# Altium PCB Motor_Driver_IR2184_Board_V1.1.PcbDoc
Units mil, origin at the board's own origin, x right, y up, seen from the top; angles counter-clockwise.
Board outline 3484.25 x 1968.5 mil, 2 copper layers (Top Layer, Bottom Layer); 71 components, 42 nets, 198 pads, 208 vias.
Unrouted connection lines stored in the file: 1.
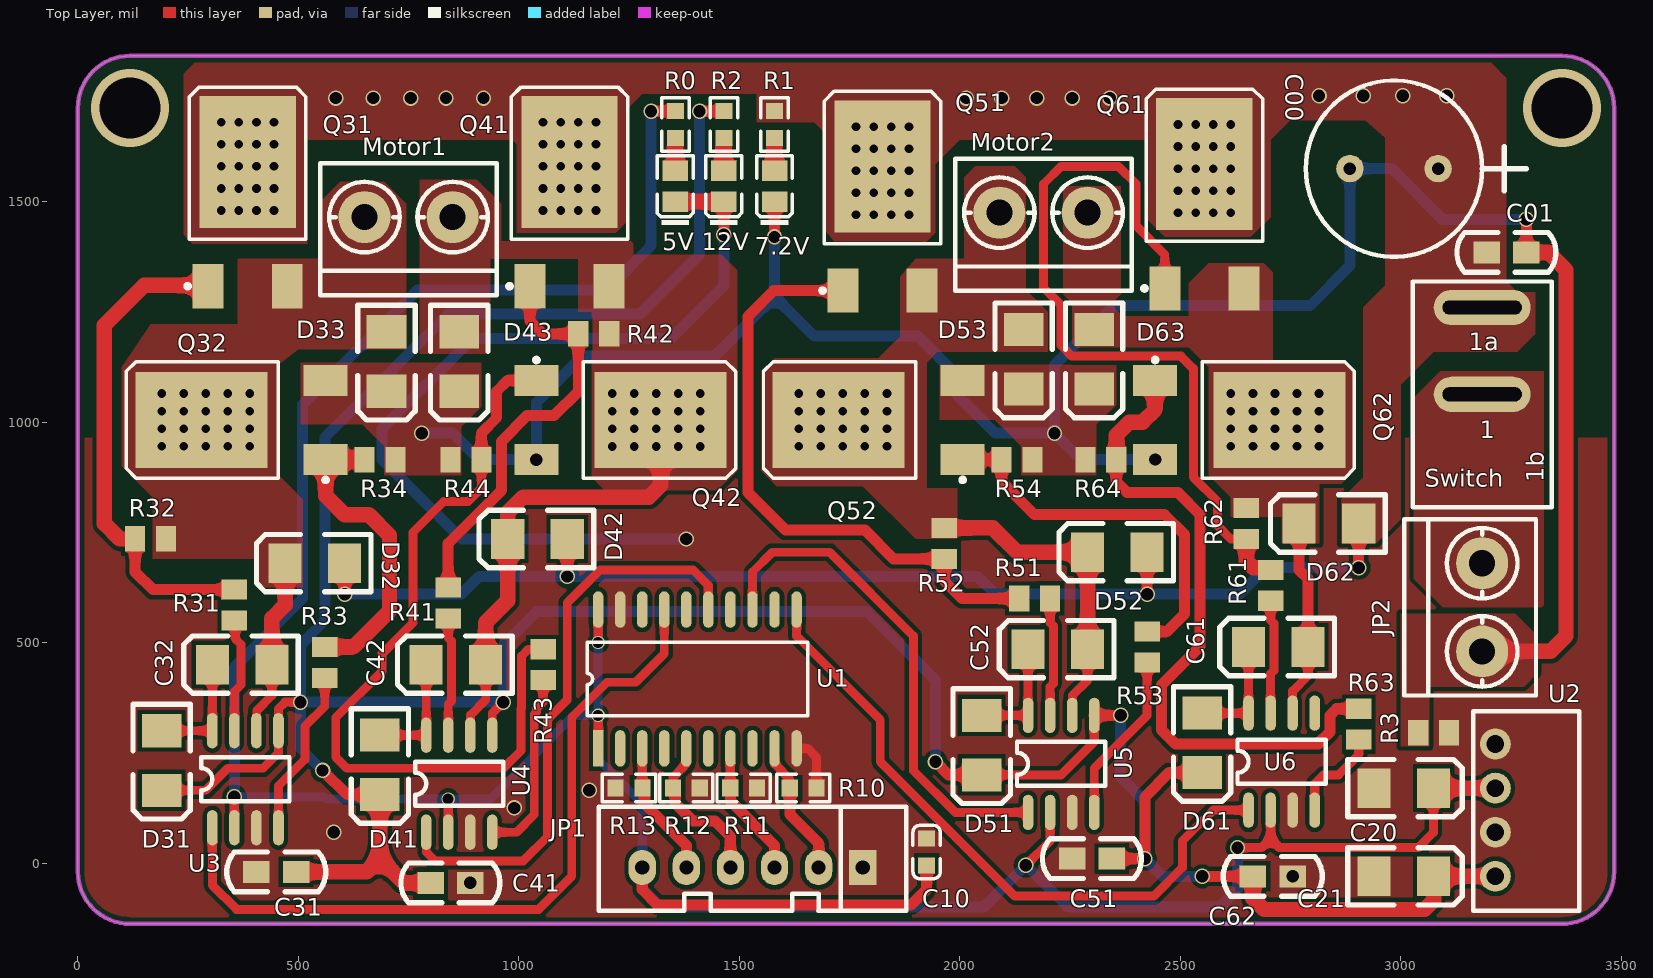
[diagram p0: Top Layer view]
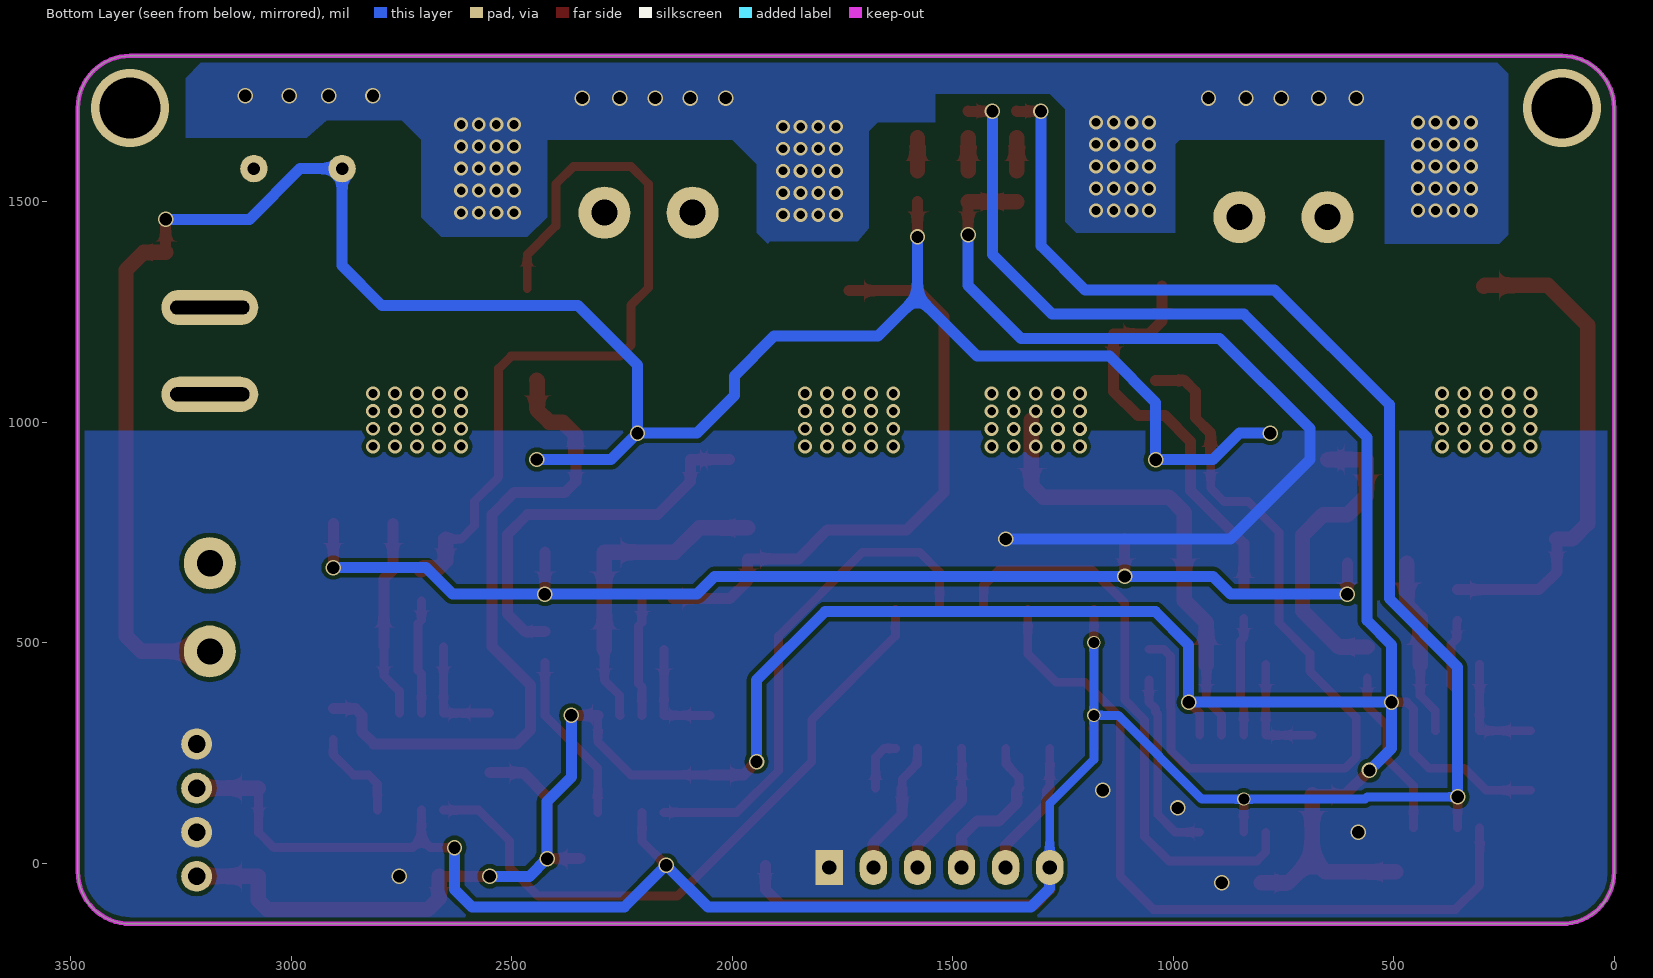
[diagram p1: Bottom Layer view, seen from below]
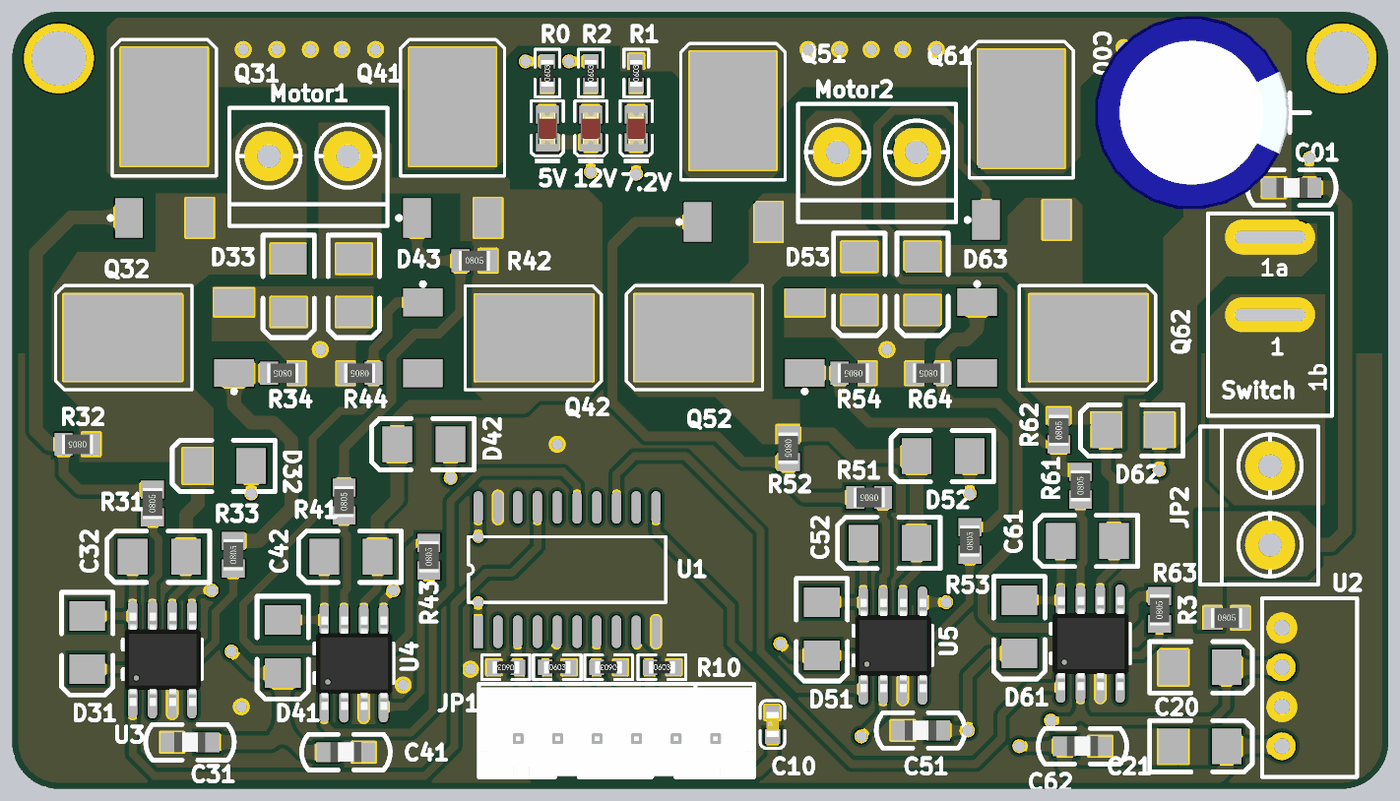
[diagram p2: 3D render of the assembled board from above, using the file's embedded part models]

## Layer stack, top to bottom
Top Solder: solder mask 0.4, Solder Resist, Dk 3.5
Top Layer: signal copper 1.4
Dielectric 1: dielectric 12.6, FR-4, Dk 4.8
Bottom Layer: signal copper 1.4
Bottom Solder: solder mask 0.4, Solder Resist, Dk 3.5

## Board outline
0,-19.68 0,1712.6 cw(c118.11,1712.6) 118.11,1830.71 3366.14,1830.71 cw(c3366.14,1712.6) 3484.25,1712.6 3484.25,-19.69 cw(c3366.14,-19.69) 3366.14,-137.8 118.11,-137.8 cw(c118.11,-19.68)

## Design rules (kind name [scope] priority, off if disabled: settings)
Clearance [All] p1: gap=10 ignorepadtopadclearanceinfootprint=FALSE except(0: Arc-Hole Track-Hole SMDPad-Hole THPad-Hole Via-Hole Fill-Hole Poly-Hole Region-Hole Text-Hole)
HoleSize [All] p1 off: absolutevalues=TRUE maxlimit=100 minlimit=1 maxpercent=80.000 minpercent=20.000
HoleToHoleClearance [All] p1 off: gap=10 allowstackedmicrovias=TRUE
MinimumSolderMaskSliver [All] p1 off: minsoldermaskwidth=10
PolygonConnect [All] p1: connectstyle=Direct reliefconductorwidth=10 reliefentries=4 polygonreliefangle="90 Angle" airgapwidth=10
RoutingVias [All] p1: holewidth=28 width=50 viastyle="Through Hole" minholewidth=28 minwidth=50 maxholewidth=28 maxwidth=50
SilkToSilkClearance [All] p1 off: silktosilkclearance=10
SilkToSolderMaskClearance [IsPad] p1 off: minsilkscreentomaskgap=10 clearancetoexposedcopper=TRUE
SolderMaskExpansion [All] p1: expansion=4
Width [All] p1: maxlimit=35 minlimit=10 preferedwidth=25
25 further rules are at their usual default settings.

## Components (designator, comment, footprint, x,y, rotation, side; value= is the part's Value field where it differs from the comment)
5V "" 0805_LED_S1 1355,1535 r90 top
7.2V "" 0805_LED_S1 1580,1535 r90 top
12V "" 0805_LED_S1 1465,1535 r90 top
C00 "470uF/25V" RB.2/.4 3085,1575 r0 top
C01 "100nF" 0805C 3285,1385 r180 top
C10 "100nF" 0603_C 1925,25 r90 top
C20 "" 3528 3075,170 r0 top value=4.7uF
C21 "" 3528 3075,-30 r0 top value=2.2uF
C31 "100nF" 0805C 495,-20 r180 top
C32 "10uF/35V" 3528 305,450 r180 top
C41 "100nF" 0805C 800,-45 r0 top
C42 "10uF/35V" 3528 790,450 r180 top
C51 "100nF" 0805C 2345,10 r180 top
C52 "10uF/35V" 3528 2155,485 r180 top
C61 "10uF/35V" 3528 2655,490 r180 top
C62 "100nF" 0805C 2665,-30 r0 top
D31 "1N5819" 3528 190,165 r270 top
D32 "1N5819" 3528 470,680 r180 top
D33 "1N5819" 3528 700,1070 r270 top
D41 "1N5819" 3528 685,155 r270 top
D42 "1N5819" 3528 975,735 r180 top
D43 "1N5819" 3528 865,1070 r270 top
D51 "1N5819" 3528 2050,200 r270 top
D52 "1N5819" 3528 2290,705 r180 top
D53 "1N5819" 3528 2145,1075 r270 top
D61 "1N5819" 3528 2550,205 r270 top
D62 "1N5819" 3528 2770,770 r180 top
D63 "1N5819" 3528 2305,1075 r270 top
JP1 "HEADER 6" SIP6N 1780,-10 r180 top
JP2 "HEADER 2" KF301-2P 3185,580 r180 top
Motor1 "HEADER 2" KF301-2P 750,1465 r270 top (schematic designator "Motor 1")
Motor2 "HEADER 2" KF301-2P 2190,1475 r270 top
Q31 "IR7843" LR7843 385,1450 r270 top
Q32 "IR7843" LR7843 420,1005 r0 top
Q41 "IR7843" LR7843 1115,1450 r270 top
Q42 "IR7843" LR7843 1181.73,1004.76 r180 top
Q51 "IR7843" LR7843 1825,1440 r270 top
Q52 "IR7843" LR7843 1865,1005 r0 top
Q61 "IR7843" LR7843 2555,1445 r270 top
Q62 "IR7843" LR7843 2585,1005 r180 top
R0 "4.7K" 0603_R 1355,1675 r90 top
R1 "4.7K" 0603_R 1580,1675 r90 top
R2 "4.7K" 0603_R 1465,1675 r90 top
R3 "0" 0805 3075,295 r0 top
R10 "10K" 0603_R 1645,170 r0 top
R11 "10K" 0603_R 1510,170 r180 top
R12 "10K" 0603_R 1380,170 r0 top
R13 "10K" 0603_R 1250,170 r180 top
R31 "20" 0805 355,585 r90 top
R32 "10k" 0805 165,735 r180 top
R33 "20" 0805 560,455 r90 top
R34 "10k" 0805 685,915 r180 top
R41 "20" 0805 840,590 r90 top
R42 "10k" 0805 1170,1200 r0 top
R43 "20" 0805 1055,450 r90 top
R44 "10k" 0805 880,915 r180 top
R51 "20" 0805 2170,600 r180 top
R52 "10k" 0805 1965,725 r270 top
R53 "20" 0805 2425,490 r90 top
R54 "10k" 0805 2130,915 r180 top
R61 "20" 0805 2705,630 r90 top
R62 "10k" 0805 2650,770 r90 top
R63 "20" 0805 2905,315 r90 top
R64 "10k" 0805 2320,915 r180 top
Switch "HEADER 2" SWITCH-MINI 3185,1063.15 r90 top
U1 "74HC245" SOP20 1180,260 r90 top
U2 "B0512S-1W" SIP4_B_S-1W 3165,-108 r0 top
U3 "IR2184" SO-8 305,80 r90 top
U4 "IR2184" SO-8 790,70 r90 top
U5 "IR2184" SO-8 2155,115 r90 top
U6 "IR2184" SO-8 2655,120 r90 top

## Footprints (in the part's own frame and the unit in brackets; to place one, negate y for a bottom-side part, rotate by r counter-clockwise, add the part's x,y. Pads: shape width x height; smd on the part's side, far side on the other; paste and mask are expansions set on the pad)
0603_C [mm]
  rect 0.93x0.98 smd: 1(-0.77,0) 2(0.77,0)
  silkscreen extent -1.53,-0.79 1.54,0.79, body extent -0.8,-0.4 0.8,0.4, height 0.3
0603_R [mm]
  rect 0.93x0.98 smd: 1(-0.77,0) 2(0.77,0)
  silkscreen extent -1.53,-0.79 1.54,0.79, body extent -0.85,-0.4 0.85,0.4, height 0.56
0805 [mm]
  rect 1.16x1.47 smd: 1(-0.89,0) 2(0.89,0)
  body extent -1,-0.63 1,0.63, height 0.55
0805_LED_S1 [mm]
  rect 1.16x1.47 smd: A(0.89,0) K(-0.89,0)
  silkscreen extent -2.24,-1.04 1.77,1.03, body extent -1.01,-0.62 1.01,0.62, height 1.1
0805C [mil]
  rect 60x50 smd: 1(0,0) 2(90,0)
  silkscreen extent -67,-45 157,45, body extent 6,-26 84,26, height 29
3528 [mil]
  rect 75x90 smd: 1(0,0) 2(-135,0)
  silkscreen extent -195,-65 65,65
KF301-2P [mm]
  round 3 hole 1.5: 1(0,2.54) 2(0,-2.54)
  silkscreen extent -3.1,-5.08 4.5,5.08
LR7843 [mm]
  rect 7.6x5.55 smd: 1(-3.556,0)
  rect 2.54x1.778 smd: 2(3.6,-2.28) 3(3.6,2.28)
  silkscreen extent -7.87,-3.58 3.72,3.35
RB.2/.4 [mil]
  round 62 hole 28: 1(0,0) 2(-200,0)
  silkscreen extent -300,-200 200,200, body extent -345,-246 147,246, height 986
SIP4_B_S-1W [mil]
  round 70 hole 40: 1(50,378) 2(50,278) 3(50,178) 4(50,78)
  silkscreen extent 0,0 240,453
SIP6N [mil]
  rect 62x80 hole 32: 1(0,0)
  oval 62x80 hole 32: 2(100,0) 3(200,0) 4(300,0) 5(400,0) 6(500,0)
  silkscreen extent -98,-138 598,98, body extent -99,-129 597,95, height 277
SO-8 [mil]
  oval 80x24 smd: 1(0,0) 2(0,-50) 3(0,-100) 4(0,-150) 5(220,-150) 6(220,-100) 7(220,-50) 8(220,0)
  silkscreen extent 60,-175 160,25, body extent -8,-172 228,20, height 67
SOP20 [mm]
  rect 2.1x0.6 smd: 1(0,0)
  oval 2.1x0.6 smd: 2(0,-1.27) 3(0,-2.54) 4(0,-3.81) 5(0,-5.08) 6(0,-6.35) 7(0,-7.62) 8(0,-8.89) 9(0,-10.16) 10(0,-11.43) 11(8,-11.43) 12(8,-10.16) 13(8,-8.89) 14(8,-7.62) 15(8,-6.35) 16(8,-5.08) 17(8,-3.81) 18(8,-2.54) 19(8,-1.27) 20(8,0)
  silkscreen extent 1.89,-12.06 6.11,0.64
SWITCH-MINI [mil]
  oval 80x220 hole 31.5 slot 180 at 90 deg: 1(0,0) 2(196.85,0)
  silkscreen extent -256,-157 256,157

## Part data
5V 7.2V 12V: library part LED
C00 C32 C42 C52 C61: library part CAPACITOR, "Capacitor"
C01 C10 C31 C41 C51 C62: library part CAP, "Capacitor"
C20 C21: library part "Cap Pol3", "Polarized Capacitor (Surface Mount)", LatestRevisionDate=29-May-2009, LatestRevisionNote="IPC-7351 Footprint Added.", PackageDescription="Chip Capacitor", PackageReference=C0805, Published=8-Jun-2000, Publisher="Altium Limited"
D31 D32 D33 D41 D42 D43 D51 D52 D53 D61 D62 D63: library part Diode, "Default Diode", Code_JEDEC=DO-214-AB, LatestRevisionDate=17-Jul-2002, LatestRevisionNote="Re-released for DXP Platform.", PackageDescription="DO-214-AB/SMC; 2 C-Bend Leads; Body 7.9 x 5.9 mm, inc. leads (LxW)", PackageReference=SMC, PackageVersion=Sep-1996, Published=8-Jun-2000, Publisher="Altium Limited"
Q31 Q32 Q41 Q42 Q51 Q52 Q61 Q62: library part MOSFET-N, "N-Channel MOSFET", LatestRevisionDate=17-Jul-2002, LatestRevisionNote="Re-released for DXP Platform.", PackageDescription="TO, Flat Index; 3 In-Line, Axial Leads; Body Dia. 4.6mm; Lead Dia. 0.5 mm (max)", PackageReference=E3, PackageVersion=1995/1996, Published=8-Jun-2000, Publisher="Altium Limited"
R0 R1 R2 R3 R10 R11 R12 R13: library part RES2
R31 R32 R33 R34 R41 R42 R43 R44 R51 R52 R53 R54 R61 R62 R63 R64: library part RES2_1
U2: library part "4 HEADER", "4 Pin Header"

## Via types
v1: diameter 31.5, hole 19.68, Top Layer to Bottom Layer, 160 vias
v2: diameter 35, hole 28, Top Layer to Bottom Layer, 43 vias
v3: diameter 30, hole 25, Top Layer to Bottom Layer, 3 vias
v4: diameter 177.17, hole 137.8, Top Layer to Bottom Layer, 2 vias

## Nets (pads, with @x,y where several pads share a name; then routed paths per layer and width w, separated by ;. In a path a pad name is that pad's centre, name@x,y a point inside that pad or via, vN(x,y) a via of type N, cw(c..) or ccw(c..) an arc to the next point about the centre after c; other vN are vias at no path point)
5V: C10.1 C20.1 JP1.6 R0.2 U1.1 U1.20 U2.2 U3.2 U4.2 U5.2 U6.2 | length 7313.5
  Top Layer w20: U3.2 v2(355,150) ; U4.2 v3(840,145) ; U1.1 v3(1180,335) ; v3(1180,500) U1.20 ; v2(2150,-5) 2205,50 U5.2 ; v2(2630,35) 2685,35 2705,55 ; U6.2 2705,55 ; C20.1 3074.23,169.23 3074.23,69.23 3040,35 2725,35 2705,55
  Top Layer w25: JP1.6 1280,-60 1315,-95 1890,-95 1925,-60 C10.1 ; v2(1300,1705) 1354.68,1705 R0.2
  Top Layer w35: C20.1 U2.2
  Bottom Layer w20: v2(355,150) 560,150 565,145 v3(840,145) 935,145 1125,335 v3(1180,335) ; v3(1180,500) v3(1180,335) ; JP1.6 1280,135 1180,235 v3(1180,335)
  Bottom Layer w25: v2(355,150) 355,445 510,600 510,1040 770,1300 1200,1300 1300,1400 v2(1300,1705) ; JP1.6 1280.44,-10.44 1280.44,-57.86 1322.58,-100 2055,-100 v2(2150,-5) 2245,-100 2590,-100 2630,-60 v2(2630,35)
7.2V: C00.1 C01.2 D32.2 D42.2 D52.2 D62.2 Q31.1 Q41.1 Q51.1 Q61.1 R1.2 Switch.2 | length 2708
  Top Layer w25: v2(605,610) D32.2 ; v2(1110,650) D42.2 ; v2(2425,610) D52.2 ; v2(2905,670) D62.2
  Bottom Layer w25: v2(605,610) 870,610 910,650 v2(1110,650) 2040,650 2080,610 v2(2425,610) 2635,610 2695,670 v2(2905,670)
  other v1: 1765,1470 1805,1470 1845,1470 1885,1470 2495,1475 2535,1475 2575,1475 2615,1475 325,1480 365,1480 405,1480 445,1480 1055,1480 1095,1480 1135,1480 1175,1480 1765,1520 1805,1520 1845,1520 1885,1520 2495,1525 2535,1525 2575,1525 2615,1525 325,1530 365,1530 405,1530 445,1530 1055,1530 1095,1530 1135,1530 1175,1530 1765,1570 1805,1570 1845,1570 1885,1570 2495,1575 2535,1575 2575,1575 2615,1575 325,1580 365,1580 405,1580 445,1580 1055,1580 1095,1580 1135,1580 1175,1580 1765,1620 1805,1620 1845,1620 1885,1620 2495,1625 2535,1625 2575,1625 2615,1625 325,1630 365,1630 405,1630 445,1630 1055,1630 1095,1630 1135,1630 1175,1630 1765,1670 1805,1670 1845,1670 1885,1670 2495,1675 2535,1675 2575,1675 2615,1675 325,1680 365,1680 405,1680 445,1680 1055,1680 1095,1680 1135,1680 1175,1680
  other v2: 585,1735 670,1735 755,1735 835,1735 920,1735 2015,1735 2095,1735 2175,1735 2255,1735 2340,1735 2815,1740 2915,1740 3005,1740 3105,1740
"7.2V In": JP2.2 Switch.1
12V: C21.1 C31.1 C41.1 C51.1 C62.1 D31.1 D41.1 D51.1 D61.1 R2.2 U2.4 U3.5 U4.5 U5.5 | length 7404.9
  Top Layer w20: D31.1 290,165 340,215 420,215 455,250 U3.5 455,350 470,365 v2(505,365) ; U4.5 940,340 v2(965,365) ; D51.1 2230,200 2305,275 U5.5
  Top Layer w25: v2(555,210) 610,155 D41.1 ; v2(1410,1705) 1464.68,1705 R2.2 ; v2(1945,230) 1975,200 D51.1 ; U5.5 v2(2365,335) ; C51.1 v2(2420,10) 2420,150 2475,205 D61.1 ; v2(2550,-30) C62.1
  Top Layer w35: C31.1 655,-20 685,10 ; D41.1 685,10 ; C41.1 740,-45 685,10 ; C62.1 2665,-80 2690.3,-105.3 3054.5,-105.3 3075,-84.79 C21.1 U2.4
  Bottom Layer w25: v2(555,210) 505,260 v2(505,365) ; v2(1410,1705) 1410,1380 1275,1245 840,1245 560,965 560,550 505,495 v2(505,365) ; v2(1945,230) 1945,415 1790,570 1040,570 965,495 v2(965,365) v2(505,365) ; v2(2365,335) 2365,195 2420,140 v2(2420,10) 2460,-30 v2(2550,-30)
GND: 5V.K 12V.K C10.2 C20.2 C21.2 C31.2 C41.2 C51.2 C62.2 JP1.1 R3.2 R10.2 R11.1 R12.2 R13.2 U1.10 U1.19 U2.1 U2.3 U3.3 U4.3 U5.3 U6.3 | length 2167.9
  Top Layer w20: U1.10 1655,260 1675,240 R10.2@1675,169.68
  Top Layer w25: v2(1465,1425) 12V.K
  Top Layer w35: 5V.K 12V.K
  Bottom Layer w25: v2(1380,735) 870,735 690,915 690,985.36 894.64,1190 1345,1190 1465,1310 v2(1465,1425)
  other v2: 890,-45 2755,-30 580,70 990,125 1160,165
"Motor In1": U1.17 U3.1 | length 1728.9
  Top Layer w20: U3.1 305,-50 360,-105 1045,-105 1120,-30 1120,330 1200,410 1265,410 1330,475 U1.17
"Motor In2": U1.15 U4.1 | length 1320.3
  Top Layer w20: U4.1 790,25 810,5 1010,5 1065,60 1065,325 1110,370 1110,590 1185,665 1395,665 1430,630 U1.15
"Motor In3": U1.13 U5.1 | length 1151.7
  Top Layer w20: U1.13 1530,660 1575,705 1705,705 1895,515 1895,210 1990,115 U5.1
"Motor In4": U1.11 U6.1 | length 1500.9
  Top Layer w20: U1.11 1630,515 1820,325 1820,230 2125,-75 2440,-75 2505,-10 2505,50 2575,120 U6.1
"Motor Out1": C32.2 D32.1 D33.2 Motor1.2 Q31.3 Q32.1 R32.1 U3.6 | length 406.9
  Top Layer w20: U3.6 405.77,300.77 405.77,345.77 440,380 C32.2
  Top Layer w35: C32.2 440,555 470,585 D32.1
  other v1: 190,945 240,945 290,945 340,945 390,945 190,985 240,985 290,985 340,985 390,985 190,1025 240,1025 290,1025 340,1025 390,1025 190,1065 240,1065 290,1065 340,1065 390,1065
"Motor Out2": C42.2 D42.1 D43.2 Motor1.1 Q41.3 Q42.1 R42.2 U4.6 | length 1060.5
  Top Layer w20: U4.6 890.77,290.77 890.77,335.77 925,370 C42.2
  Top Layer w35: C42.2 925,545 975,595 D42.1 975,795 1010,830 1295,830 1321.73,856.73 Q42.1
  other v1: 1211.73,944.76 1261.73,944.76 1311.73,944.76 1361.73,944.76 1411.73,944.76 1211.73,984.76 1261.73,984.76 1311.73,984.76 1361.73,984.76 1411.73,984.76 1211.73,1024.76 1261.73,1024.76 1311.73,1024.76 1361.73,1024.76 1411.73,1024.76 1211.73,1064.76 1261.73,1064.76 1311.73,1064.76 1361.73,1064.76 1411.73,1064.76
"Motor Out3": C52.2 D52.1 D53.2 Motor2.2 Q51.3 Q52.1 R52.1 U5.6 | length 732.3
  Top Layer w20: U5.6 2255.77,335.77 2255.77,380.77 2290,415 C52.2
  Top Layer w35: R52.1 R52.1 2075,760 2130,705 D52.1 C52.2
  other v1: 1635,945 1685,945 1735,945 1785,945 1835,945 1635,985 1685,985 1735,985 1785,985 1835,985 1635,1025 1685,1025 1735,1025 1785,1025 1835,1025 1635,1065 1685,1065 1735,1065 1785,1065 1835,1065
"Motor Out4": C61.2 D62.1 D63.2 Motor2.1 Q61.3 Q62.1 R62.2 U6.6 | length 452.8
  Top Layer w20: U6.6 2755,390 2790,425 C61.2
  Top Layer w25: D62.1 2770,665 2790,645 C61.2
  other v1: 2615,945 2665,945 2715,945 2765,945 2815,945 2615,985 2665,985 2715,985 2765,985 2815,985 2615,1025 2665,1025 2715,1025 2765,1025 2815,1025 2615,1065 2665,1065 2715,1065 2765,1065 2815,1065
Net5V_A: 5V.A R0.1 | length 74.6
  Top Layer w35: 5V.A R0.1
Net7.2V_A: 7.2V.A R1.1 | length 74.6
  Top Layer w35: 7.2V.A R1.1
Net12V_A: 12V.A R2.1 | length 74.6
  Top Layer w35: 12V.A R2.1
NetC32_1: C32.1 D31.2 U3.8 | length 265
  Top Layer w20: D31.2 U3.8 C32.1
NetC42_1: C42.1 D41.2 U4.8 | length 265
  Top Layer w20: D41.2 U4.8 C42.1
NetC52_1: C52.1 D51.2 U5.8 | length 255
  Top Layer w20: D51.2 U5.8 C52.1
NetC61_1: C61.1 D61.2 U6.8 | length 255
  Top Layer w20: D61.2 U6.8 C61.1
NetC62_1: U6.5
NetQ31_2: Q31.2 R31.2 R32.2 | length 1124.3
  Top Layer w25: R32.2 R32.2 130,660 169.96,620.04 R31.2
  Top Layer w35: R32.2 95,735 60,770 60,1220 150,1310 293.5,1310 Q31.2
NetQ32_2: Q32.2 R33.2 R34.2 | length 704.7
  Top Layer w35: R33.2 625.04,490.04 706.73,571.73 706.73,743.27 660,790 605,790 561.73,833.27 Q32.2 561.85,915.12 649.84,915.12 R34.2
NetQ41_2: Q41.2 R41.2 R42.1 | length 933.5
  Top Layer w25: R41.2 840,725 960.37,845.37 960.37,956.56 1018.82,1015 1080,1015 1134.96,1069.96 R42.1 1055,1200 1025.24,1229.76 Q41.2
NetQ42_2: Q42.2 R43.2 R44.1 | length 1830.7
  Top Layer w20: R44.1 915.04,850.04 885,820 830,820 760,750 760,545 690,475 690,435 585,330 585,240 610,215 965,215 1005,255 1005,349.85 1006.06,350.92 1006.06,469.35 1021.72,485 R43.2 R43.2
  Top Layer w25: R44.1 915.04,975.04 950,1010 950,1070 974.53,1094.53 Q42.2
NetQ51_2: Q51.2 R51.2 R52.2 | length 1383
  Top Layer w25: Q51.2 1578.27,1298.27 1520,1240 1520,840 1605,755 1785,755 1850.04,689.96 R52.2 1965,640 2005,600 R51.2
NetQ52_2: Q52.2 R53.2 R54.2 | length 884.6
  Top Layer w25: Q52.2 2006.85,915.12 2094.84,915.12 R54.2 2094.96,865.04 2170,790 2465,790 2510,745 2510,565 2470,525 R53.2 R53.2
NetQ61_2: Q61.2 R61.2 R62.1 | length 1780.8
  Top Layer w20: Q61.2 2465.24,1380 2465,1380 2400,1445 2400,1540 2360,1580 2230,1580 2190,1540 2190,1305 2230,1265 2230,1174.22 2254.45,1149.76 2501.55,1149.76 2530,1121.32 2530,875 2585,820 2585,764.96 2615,734.96 R62.1
  Top Layer w35: R62.1 2650,685.54 2665.5,670.04 2700,670.04 R61.2
NetQ62_2: Q62.2 R63.2 R64.1 | length 1545.9
  Top Layer w25: R64.1 R64.1 2355,865 2380,840 2495,840 2545,790 2545,491.37 2457.5,403.87 2457.5,302.14 2489.64,270 2814.04,270 2814.04,272.25 2839.5,297.71 2839.5,334.5 2855,350 R63.2 R63.2
  Top Layer w35: R64.1 2355.53,915.49 2355.53,970.53 2385,1000 2415,1000 2442.77,1027.77 2442.77,1094.26 Q62.2
NetR31_1: R31.1 U3.7 | length 262.4
  Top Layer w20: U3.7 355,389.22 370,404.22 370,495.78 356.94,508.84 356.94,548.02 R31.1
NetR33_1: R33.1 U3.4 | length 383.5
  Top Layer w20: U3.4 455,175 515,235 515,310 560,355 R33.1
NetR41_1: R41.1 U4.7 | length 271.2
  Top Layer w20: U4.7 840,360 847.5,367.5 847.5,503.28 840,510.78 R41.1
NetR43_1: R43.1 U4.4 | length 424.8
  Top Layer w20: U4.4 995,70 1035,110 1035,337.43 1040,342.43 1040,350 1055,365 R43.1
NetR51_1: R51.1 U5.7 | length 271.2
  Top Layer w20: U5.7 2205,400 2212.5,407.5 2212.5,538.28 2205.04,545.74 R51.1
NetR53_1: R53.1 U5.4 | length 389.7
  Top Layer w20: U5.4 2305,215 2425,335 R53.1
NetR61_1: R61.1 U6.7 | length 261.2
  Top Layer w20: U6.7 2705,429.22 2712.5,436.72 2712.5,543.28 2705,550.78 R61.1
NetR63_1: R63.1 U6.4 | length 221.4
  Top Layer w20: U6.4 2805,180 2825,200 2859.22,200 2905,245.78 R63.1
PGND: 7.2V.K C00.2 C01.1 D33.1 D43.1 D53.1 D63.1 JP2.1 Q32.3 Q42.3 Q52.3 Q62.3 R3.1 R34.1 R44.2 R54.1 R64.2 | length 5113.9
  Top Layer w25: v2(1580,1420) 7.2V.K ; C01.1 v2(3285,1460)
  Top Layer w35: JP2.1 3340,480 3375,515 3375,1345 3335,1385 C01.1
  Bottom Layer w25: v2(780,975) 850,975 910,915 v2(1040,915) 1040,1045 1145,1150 1445,1150 1580,1285 ; v2(1580,1420) 1580,1285 ; v2(2443.27,915.24) 2274.76,915.24 v2(2215,975) ; v2(3285,1460) 3095,1460 2980,1575 C00.2 2885,1355 2795,1265 2350,1265 2215,1130 v2(2215,975) ; 1580,1285 1670,1195 1905,1195 1995,1105 1995,1060 2080,975 v2(2215,975)
PWM1: JP1.5 R13.1 U1.3 | length 311.4
  Top Layer w20: U1.3 1280,170.31 R13.1
  Top Layer w25: R13.1 1285.47,164.84 1285.47,134.53 1380,40 JP1.5
PWM2: JP1.4 R12.1 U1.5 | length 365.8
  Top Layer w20: R12.1 1350,170.31 1350,195 1380,225 U1.5
  Top Layer w25: R12.1 1355.16,164.53 1355.16,134.84 1395,95 1445,95 1480,60 JP1.4
PWM3: JP1.3 R11.2 U1.7 | length 311.8
  Top Layer w20: R11.2 1479.53,170.16 1479.53,259.53 U1.7
  Top Layer w25: R11.2 1479.68,140.32 1580,40 JP1.3
PWM4: JP1.2 R10.1 U1.9 | length 311.4
  Top Layer w20: U1.9 1580,225 1614.69,190.31 R10.1
  Top Layer w25: R10.1 1614.69,110.31 1680,45 JP1.2
pads on no net: U1.2 U1.4 U1.6 U1.8 U1.12 U1.14 U1.16 U1.18
copper on no net:
  other v4: 118.11,1712.6 3366.14,1712.6

## Polygon pours and split planes (outlines as drawn)
GND on Top Layer "Top Layer-No Net" (solid, remove dead copper, pour order 68): -220,910 -165,965 4030,965 4030,-355 4020,-365 3990,-335 -205,-335
7.2V on Top Layer "Top Layer-No Net" (solid, remove dead copper, pour order 66): 2865,725 2945,725 3000,780 3000,1085 3075,1160 3265,1160 3305,1200 3305,1295 3265,1295 3240,1320 3230,1310 2965,1310 2915,1260 2915,875 2865,825
"Motor Out3" on Top Layer "Top Layer-No Net" (solid, remove dead copper, pour order 60): 1815,1040 1925,1040 1925,1135 1950,1160 1950,1195 1865,1195 1815,1145
"Motor Out4" on Top Layer "Top Layer-No Net" (solid, remove dead copper, pour order 58): 2325,1210 2400,1210 2325,1285
"Motor Out4" on Top Layer "Top Layer-No Net" (solid, remove dead copper, pour order 56): 2565,1040 2645,1040 2645,1175 2515,1175 2565,1125
no net on Top Layer "Top Layer-No Net" (solid, remove dead copper, pour order 50): 2535,1170
"Motor Out2" on Top Layer "Top Layer-No Net" (solid, remove dead copper, pour order 44): 775,1550 775,1370 1135,1370 1135,1250 1260,1250 1260,1405 1255,1410 960,1410 960,1495 905,1550
7.2V on Top Layer "Top Layer-No Net" (solid, remove dead copper, pour order 18): 520,1405 260,1405 240,1425 240,1790 265,1815 290,1815 3205,1815 3240,1780 3240,1770 3240,1295 3305,1295 3305,1200 2970,1200 2965,1205 2965,1645 2920,1685 2915,1685 2750,1685 2705,1640 2705,1465 2660,1420 2465,1420 2420,1465 2420,1640 2000,1640 1945,1585 1945,1430 1920,1405 1915,1410 1715,1410 1690,1440 1690,1445 1690,1660 1670,1680 1540,1680 1540,1745 1280,1745 1245,1710 1245,1455 1220,1430 995,1430 995,1630 985,1640 520,1640
"Motor Out4" on Top Layer "Top Layer-No Net" (solid, remove dead copper, pour order 42): 2265,1240 2520,1240 2520,1315 2565,1360 2690,1360 2710,1340 2710,1170 2263.05,1170 2262.9,1170.16
no net on Top Layer "Top Layer-No Net" (solid, remove dead copper, pour order 40): 2265,1255
PGND on Top Layer "Top Layer-No Net" (solid, remove dead copper, pour order 22): 3065,265 3065,400 3280,400 3310,430 3310,515 3260,565 3000,565 3000,265
PGND on Top Layer "Top Layer-No Net" (solid, remove dead copper, pour order 28): 1955,1130 2355,1130 2355,1040 2310,995 2310,880 2140,880 2140,945 2085,1000 2080,1005 1955,1005
no net on Top Layer "Top Layer-No Net" (solid, remove dead copper, pour order 26): 1950,1135
PGND on Top Layer "Top Layer-No Net" (solid, remove dead copper, pour order 24): 505,1135 915,1135 915,1035 870,990 870,880 695,880 695,945 645,995 505,995
"7.2V In" on Top Layer "Top Layer-No Net" (solid, remove dead copper, pour order 20): 3090,1115 3030,1055 3030,1035 3030,645 3095,580 3320,580 3325,585 3325,1115
"Motor Out4" on Top Layer "Top Layer-No Net" (solid, remove dead copper, pour order 16): 2690,1360 2710,1340 2710,1140 2715,1135 2870,1135 2895,1110 2895,890 2865,860 2815,860 2815,725 2730,725 2730,785 2615,785 2615,830 2565,880 2565,1360
"Motor Out4" on Top Layer "Top Layer-No Net" (solid, remove dead copper, pour order 14): 2230,1535 2235,1530 2235,1290 2255,1270 2255,1170 2350,1170 2350,1275 2370,1295 2365,1300 2365,1535
"Motor Out3" on Top Layer "Top Layer-No Net" (solid, remove dead copper, pour order 12): 1995,735 1900,735 1780,855 1585,855 1550,890 1550,1115 1580,1145 1865,1145 1865,1330 1900,1370 1890,1370 2010,1370 2010,1555 2035,1580 2125,1580 2150,1555 2150,1300 2155,1295 2200,1250 2200,1160 1925,1160 1925,1145 1925,850 1995,850
"Motor Out2" on Top Layer "Top Layer-No Net" (solid, remove dead copper, pour order 10): 825,1550 890,1550 935,1505 935,1160 930,1155 775,1155 775,1510
"Motor Out1" on Top Layer "Top Layer-No Net" (solid, remove dead copper, pour order 8): 745,1495 695,1545 595,1545 550,1500 550,1370 362.5,1370 362.5,1222.5 165,1222.5 100,1125 100,900 170,830 170,690 405,690 405,640 420,625 510,625 510,825 450,885 455,890 455,1130 500,1165 745,1165
no net on Top Layer "Top Layer-No Net" (solid, remove dead copper, pour order 6): 760,1180
"Motor Out2" on Top Layer "Top Layer-No Net" (solid, remove dead copper, pour order 4): 1165,1345 1165,875 1195,845 1455,845 1455,850 1495,890 1495,1345 1460,1380 1195,1380
no net on Top Layer "Top Layer-No Net" (solid, remove dead copper, pour order 2): 1155,1345
no net on Top Layer "Top Layer-No Net" (solid, remove dead copper, pour order 0): 1165,1365
GND on Bottom Layer "Top Layer-No Net" (solid, remove dead copper, pour order 70): -275,980 4070,980 4080,970 4080,-500 -920,-500 -930,-490
7.2V on Bottom Layer "Top Layer-No Net" (solid, remove dead copper, pour order 48): 520,1405 260,1405 240,1425 240,1790 265,1815 290,1815 3205,1815 3240,1780 3240,1770 3240,1645 2965,1645 2920,1685 2915,1685 2750,1685 2705,1640 2705,1465 2660,1420 2465,1420 2420,1465 2420,1640 2000,1640 1945,1585 1945,1430 1920,1405 1915,1410 1715,1410 1690,1440 1690,1445 1690,1660 1670,1680 1540,1680 1540,1745 1280,1745 1245,1710 1245,1455 1220,1430 995,1430 995,1630 985,1640 520,1640
no net on Bottom Layer "Top Layer-No Net" (solid, remove dead copper, pour order 36): -565,1185

## Keep-outs
Keep-Out Layer:
  the board outline again, w10

## Text inside footprints (layer, text, board x,y; h text height)
Switch: Top Overlay "1a" at 3155,1163.15 h39.37; Top Overlay "1" at 3180,963.15 h39.37; Top Overlay "1b" at 3325,863.15 h39.37 r90